# Altium PCB STM32F103ZET6.PCBDOC (part 4 of 5)
Units mil, origin at the board's own origin, x right, y up, seen from the top; angles counter-clockwise.
Board outline 7118.03 x 3660.03 mil, 2 copper layers (Top Layer, Bottom Layer); 158 components, 198 nets, 727 pads, 128 vias.
Unrouted connection lines stored in the file: 5.
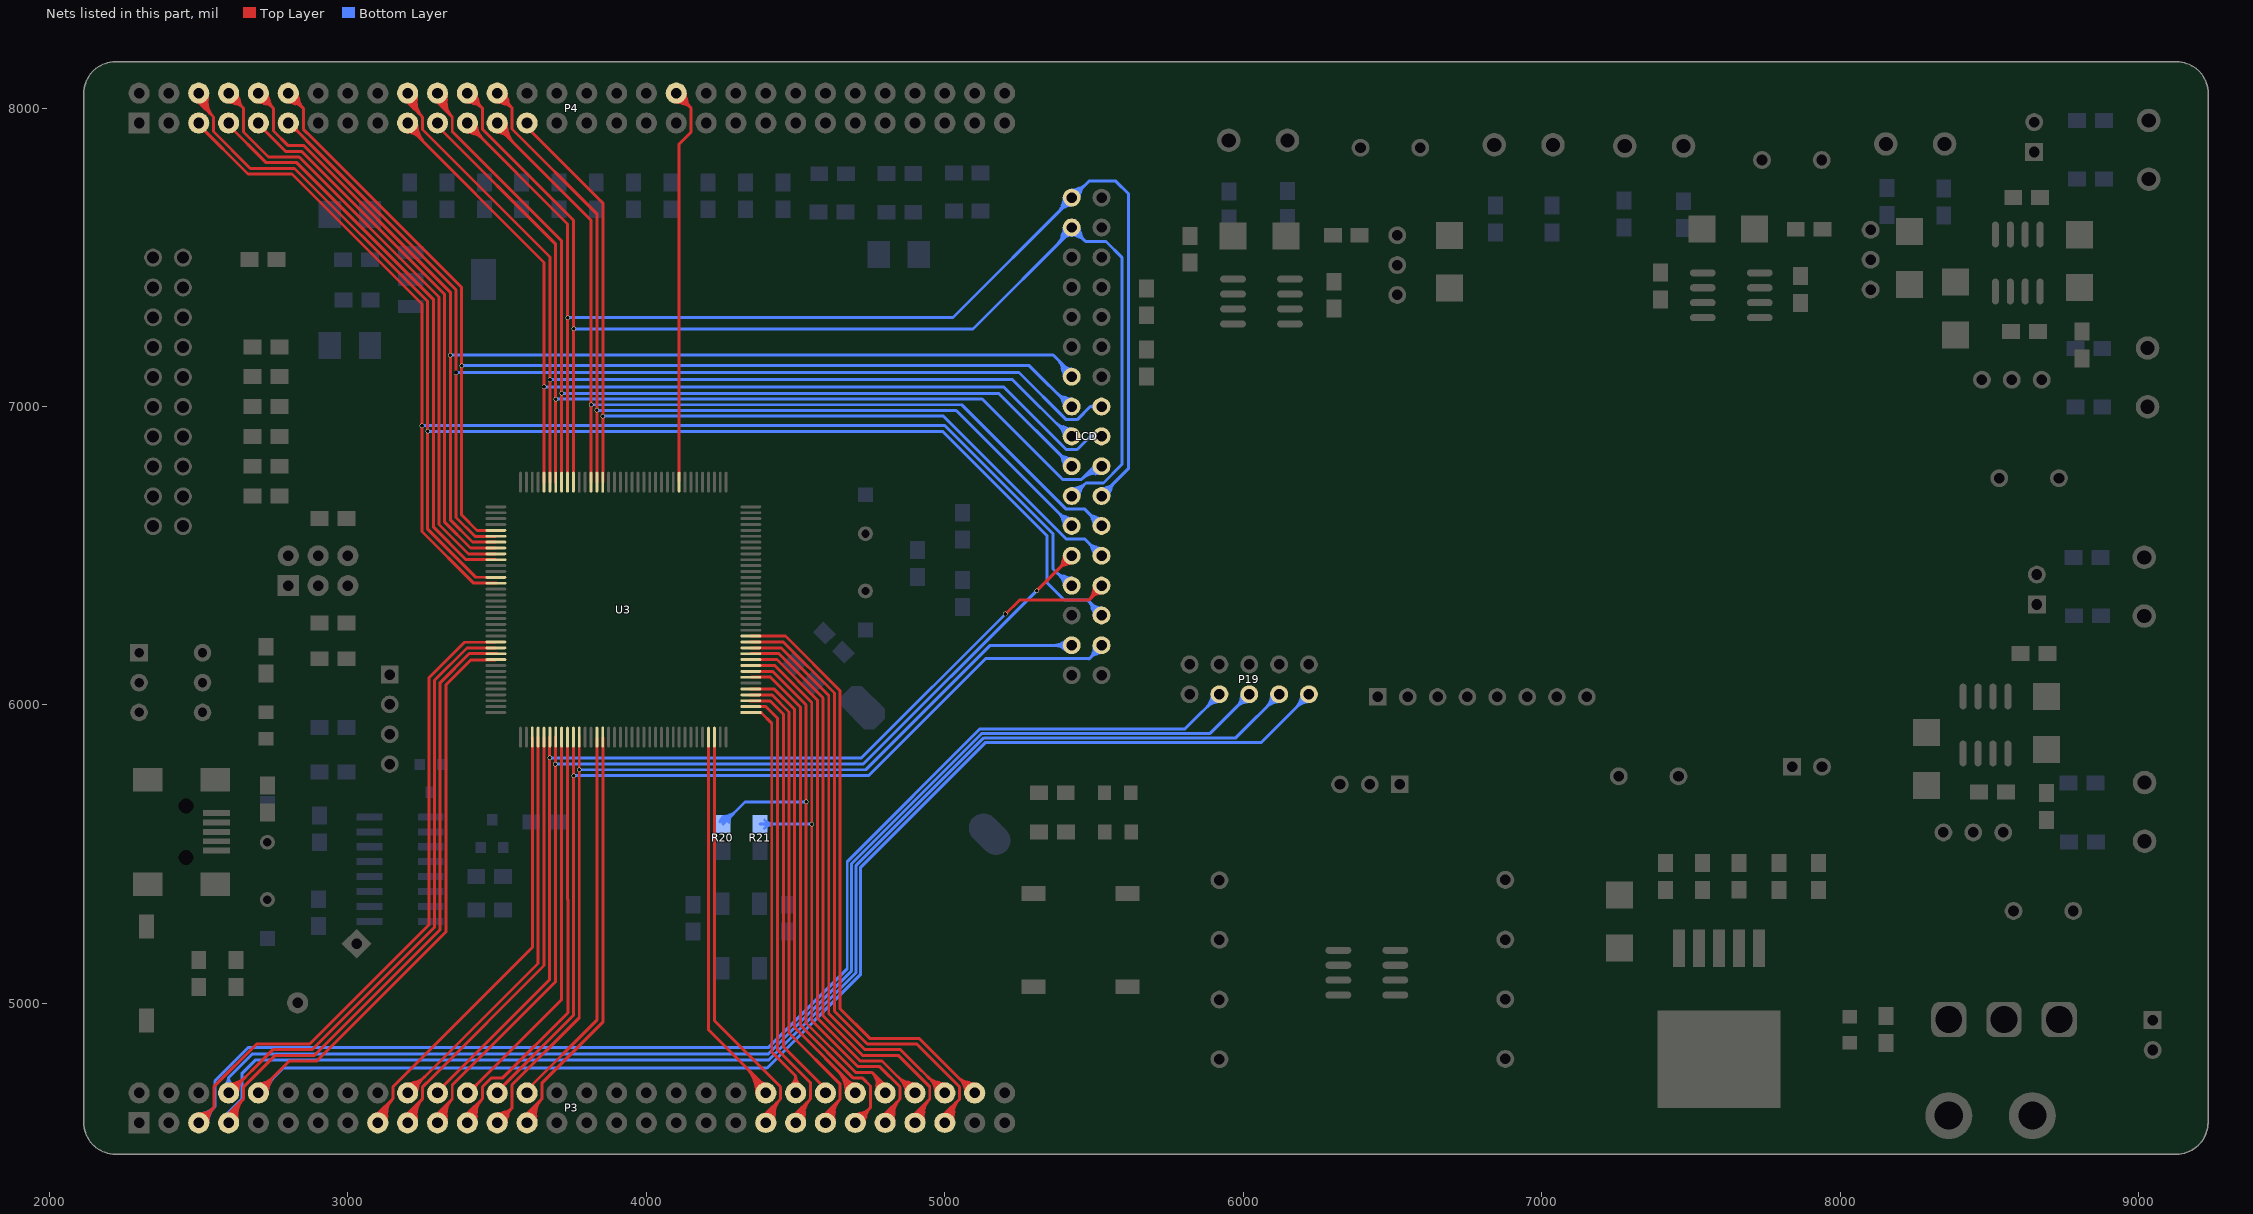
[diagram p4: the nets of this part, all layers, seen from the top]

## Via types
v1: diameter 15, hole 12, Top Layer to Bottom Layer, 57 vias
v2: diameter 28, hole 15, Top Layer to Bottom Layer, 53 vias
v3: diameter 50, hole 28, Top Layer to Bottom Layer, 10 vias
v4: diameter 12, hole 10, Top Layer to Bottom Layer, 4 vias
v5: diameter 20, hole 15, Top Layer to Bottom Layer, 2 vias
v6: diameter 48, hole 28, Top Layer to Bottom Layer, 1 vias
v7: diameter 40, hole 28, Top Layer to Bottom Layer, 1 vias

## Nets (pads, with @x,y where several pads share a name; then routed paths per layer and width w, separated by ;. In a path a pad name is that pad's centre, name@x,y a point inside that pad or via, vN(x,y) a via of type N, cw(c..) or ccw(c..) an arc to the next point about the centre after c; other vN are vias at no path point) (continued)
PC5: P4.38 U3.45 | length 1796.6
  Top Layer w10: P4.38@4090.82,8047.31 ccw(c4137.23,8060.89) 4126.39,8013.77 ; P4.38@4100,8050 4149.43,8000.57 ; P4.38@4102.69,8059.18 cw(c4089.11,8012.77) 4136.23,8023.61 ; U3.45@4110,6750 4110,7879.87 4149.43,7919.3 4149.43,8000.57 ; 4133.19,8016.81 cw(c4164.08,8047.71) 4120.42,8049.27 ccw(c4164.08,8047.71) 4133.19,8016.81 ; 4133.19,8016.81 ccw(c4102.29,7985.92) 4100.73,8029.58 cw(c4102.29,7985.92) 4133.19,8016.81 ; 4149.43,8000.57 cw(c4195.44,8046.58) 4130.41,8048.91 ccw(c4195.44,8046.58) 4149.43,8000.57 ; 4149.43,8000.57 ccw(c4103.42,7954.56) 4101.09,8019.59 cw(c4103.42,7954.56) 4149.43,8000.57
PC6: P3.5 P19.9 U3.96 | length 6995.1
  Top Layer w10: P3.5@2500,4600 2550.57,4650.57 ; P3.5@2500.4,4620.43 ccw(c2501.29,4666.61) 2533.95,4633.95 ccw(c2566.61,4601.29) P3.5@2520.43,4600.4 ; P3.5@2500.59,4630.43 ccw(c2501.92,4699.21) 2550.56,4650.56 ; P3.5@2530.43,4600.59 cw(c2599.21,4601.92) 2550.56,4650.56 ; U3.96@3495,6210.23 3390.84,6210.23 3271,6090.39 3271,5263.09 2871.91,4864 2694.09,4864 2550.57,4720.48 2550.57,4650.57
  Bottom Layer w10: P3.5@2500,4600 2554.57,4654.57 2554.57,4740.57 2667,4853 4410,4853 4673,5116 4673,5475 5118,5920 5805,5920 P19.9@5922,6037 ; P3.5@2500,4620.43 ccw(c2500,4669.76) 2534.88,4634.88 ccw(c2569.76,4600) P3.5@2520.43,4600 ; P3.5@2500,4630.43 ccw(c2500,4703.9) 2551.95,4651.95 ccw(c2603.9,4600) P3.5@2530.43,4600 ; 5876.62,5991.62 ccw(c5832.23,6036) P19.9@5895,6036 ; 5879.03,5994.03 cw(c5920,5953.06) P19.9@5920,6011 ; 5893.69,6008.69 ccw(c5866.37,6036) P19.9@5905,6036 ; 5896.1,6011.1 cw(c5920,5987.2) P19.9@5920,6021
PC7: P3.8 P19.8 U3.97 | length 6614.7
  Top Layer w10: P3.8@2600,4700 2603.22,4700 2748.22,4845 2879.78,4845 3290,5255.22 3290,6082.52 3398.71,6191.23 U3.97@3495,6191.23 ; P3.8@2600,4720.43 ccw(c2600,4777.54) 2640.38,4737.16 ; P3.8@2600,4730.43 ccw(c2600,4811.68) 2657.45,4754.23 ; P3.8@2620.43,4700 cw(c2661.99,4700) 2632.6,4729.38 ; P3.8@2630.43,4700 cw(c2696.13,4700) 2649.67,4746.45
  Bottom Layer w10: P3.8@2585.55,4726.78 ccw(c2572.49,4751) 2600,4751 ; P3.8@2600,4700 2600,4751 ; P3.8@2614.45,4726.78 cw(c2627.51,4751) 2600,4751 ; P19.8@5995,6036 cw(c5934.64,6036) 5977.32,5993.32 cw(c6020,5950.64) P19.8@6020,6011 ; P19.8@6005,6036 cw(c5968.79,6036) 5994.39,6010.39 cw(c6020,5984.79) P19.8@6020,6021 ; P19.8@6020,6036 5889,5905 5124.21,5905 4688,5468.79 4688,5109.79 4409.21,4831 2680,4831 2600,4751
PC8: P3.7 P19.7 U3.98 | length 7192
  Top Layer w10: P3.7@2600,4600 2600,4630.09 2650.57,4680.66 ; P3.7@2600.42,4600.1 cw(c2644.58,4610.51) 2612.5,4642.59 ; P3.7@2610.15,4602.39 cw(c2665.12,4615.35) 2625.19,4655.28 ; P3.7@2619.89,4604.69 cw(c2685.65,4620.19) 2637.88,4667.97 ; P3.7@2629.62,4606.98 cw(c2706.19,4625.03) 2650.56,4680.65 ; U3.98@3500,6172.23 3406.58,6172.23 3309,6074.65 3309,5247.35 2887.65,4826 2756.09,4826 2650.57,4720.48 2650.57,4680.66
  Bottom Layer w10: P3.7@2590.94,4596.92 cw(c2626.64,4609.06) 2599.98,4635.73 ; P3.7@2595.14,4630.04 ccw(c2594.22,4635.75) 2600,4635.75 ; P3.7@2600,4600 2600,4635.75 ; P3.7@2600.41,4600.14 cw(c2643.6,4614.83) 2611.34,4647.09 ; P3.7@2604.86,4630.04 cw(c2605.78,4635.75) 2600,4635.75 ; P3.7@2609.88,4603.36 cw(c2660.56,4620.6) 2622.7,4658.45 ; P3.7@2619.34,4606.58 cw(c2677.51,4626.37) 2634.07,4669.82 ; P3.7@2628.81,4609.8 cw(c2694.47,4632.14) 2645.43,4681.18 ; 6076.62,5991.62 ccw(c6032.23,6036) P19.7@6095,6036 ; 6079.03,5994.03 cw(c6120,5953.06) P19.7@6120,6011 ; 6093.69,6008.69 ccw(c6066.37,6036) P19.7@6105,6036 ; 6096.1,6011.1 cw(c6120,5987.2) P19.7@6120,6021 ; P19.7@6121,6036 5975,5890 5130.43,5890 4703,5462.57 4703,5103.57 4409.43,4810 2689,4810 2645.43,4766.43 2645.43,4681.18 ; 2600,4635.75 2645.43,4681.18
PC9: P3.10 P19.6 U3.99 | length 6704.4
  Top Layer w10: P3.10@2700,4700 2700,4704 2803,4807 2895.52,4807 3328,5239.48 3328,6066.78 3412.39,6151.17 U3.99@3495,6151.17 ; P3.10@2700,4720.43 ccw(c2700,4760.11) 2728.05,4732.05 ; P3.10@2700,4730.43 ccw(c2700,4794.25) 2745.12,4749.12 ; P3.10@2720.43,4700 cw(c2779.42,4700) 2737.71,4741.71 ; P3.10@2730.43,4700 cw(c2813.56,4700) 2754.78,4758.78
  Bottom Layer w10: P3.10@2700,4700 2784,4784 4404.64,4784 4718,5097.36 4718,5456.36 5136.64,5875 6061,5875 6220,6034 P19.6@6220,6035 ; P3.10@2700,4720.43 ccw(c2700,4769.76) 2734.88,4734.88 ccw(c2769.76,4700) P3.10@2720.43,4700 ; P3.10@2700,4730.43 ccw(c2700,4803.9) 2751.95,4751.95 ccw(c2803.9,4700) P3.10@2730.43,4700 ; 6175.91,5989.91 ccw(c6129.82,6036) P19.6@6195,6036 ; 6180.74,5994.74 cw(c6220,5955.47) P19.6@6220,6011 ; 6192.98,6006.98 ccw(c6163.96,6036) P19.6@6205,6036 ; 6197.81,6011.81 cw(c6220,5989.62) P19.6@6220,6021
PC10: P3.17 U3.111 | length 2111.8
  Top Layer w10: P3.17@3100,4600 3100,4630.09 3150.57,4680.66 ; P3.17@3106.56,4593.03 ccw(c3053.6,4649.3) 3130.83,4646.96 ; P3.17@3113.41,4585.75 ccw(c3077,4624.44) 3130.1,4622.83 ; U3.111@3617.17,5890 3618,5889.17 3618,5187.91 3150.57,4720.48 3150.57,4680.66 ; 3150.56,4680.65 ccw(c3206.19,4625.03) 3129.62,4606.98 cw(c3206.19,4625.03) 3150.56,4680.65 ; P3.17@3100.42,4600.1 cw(c3144.58,4610.51) 3112.5,4642.59 ccw(c3144.58,4610.51) P3.17@3100.42,4600.1 ; P3.17@3110.15,4602.39 cw(c3165.12,4615.35) 3125.19,4655.28 ccw(c3165.12,4615.35) P3.17@3110.15,4602.39 ; P3.17@3119.89,4604.69 cw(c3185.65,4620.19) 3137.88,4667.97 ccw(c3185.65,4620.19) P3.17@3119.89,4604.69
PC11: P3.20 U3.112 | length 1872.3
  Top Layer w10: P3.20@3190.7,4702.23 cw(c3236.88,4691.14) 3224.59,4737.02 ; P3.20@3200,4700 3203,4700 3637,5134 U3.112@3637,5892 ; P3.20@3200.42,4699.9 cw(c3255.48,4686.68) 3240.82,4741.37 ; P3.20@3200,4720.43 ccw(c3200,4777.01) 3240,4737 cw(c3200,4777.01) P3.20@3200,4720.43 ; P3.20@3200,4730.43 ccw(c3200,4811.15) 3257.07,4754.07 cw(c3200,4811.15) P3.20@3200,4730.43 ; P3.20@3220.43,4700 cw(c3262.52,4700) 3232.76,4729.76 ccw(c3262.52,4700) P3.20@3220.43,4700 ; P3.20@3230.43,4700 cw(c3296.66,4700) 3249.83,4746.83 ccw(c3296.66,4700) P3.20@3230.43,4700
PC12: P3.19 U3.113 | length 2087.2
  Top Layer w10: P3.19@3200,4600 3200,4630.09 3250.57,4680.66 ; P3.19@3206.56,4593.03 ccw(c3153.6,4649.3) 3230.83,4646.96 ; P3.19@3213.41,4585.75 ccw(c3177,4624.44) 3230.1,4622.83 ; U3.113@3657,5891 3657,5127 3279.52,4749.52 3279.52,4749.43 3250.57,4720.48 3250.57,4680.66 ; 3250.56,4680.65 ccw(c3306.19,4625.03) 3229.62,4606.98 cw(c3306.19,4625.03) 3250.56,4680.65 ; P3.19@3200.42,4600.1 cw(c3244.58,4610.51) 3212.5,4642.59 ccw(c3244.58,4610.51) P3.19@3200.42,4600.1 ; P3.19@3210.15,4602.39 cw(c3265.12,4615.35) 3225.19,4655.28 ccw(c3265.12,4615.35) P3.19@3210.15,4602.39 ; P3.19@3219.89,4604.69 cw(c3285.65,4620.19) 3237.88,4667.97 ccw(c3285.65,4620.19) P3.19@3219.89,4604.69
PC13: P3.49 U3.7 | length 2279.9
  Top Layer w10: U3.7@4352.88,6093 4415.61,6093 4516,5992.61 4516,4926.87 4693.44,4749.43 4724.57,4749.43 4750.57,4723.43 4750.57,4650.57 ; P3.49@4690.61,4602.03 cw(c4729.29,4595.11) 4719.12,4633.06 ; P3.49@4700,4600 4750.57,4650.57 ; P3.49@4700.46,4600.27 cw(c4746.41,4592.04) 4734.33,4637.14 ; P3.49@4702.37,4598.52 ccw(c4688.65,4648.8) 4739.25,4636.31 ; P3.49@4705.01,4588.87 ccw(c4693.78,4630) 4735.17,4619.78 ; 4750.56,4650.56 ccw(c4799.21,4601.92) 4730.43,4600.56 cw(c4799.21,4601.92) 4750.56,4650.56 ; P3.49@4701.97,4618.46 ccw(c4701.97,4658.29) 4730.13,4630.13 cw(c4701.97,4658.29) P3.49@4701.97,4618.46 ; P3.49@4701.97,4628.46 ccw(c4701.97,4692.43) 4747.2,4647.2 cw(c4701.97,4692.43) P3.49@4701.97,4628.46 ; P3.49@4720.43,4600.36 cw(c4766.64,4601.28) 4733.96,4633.96 ccw(c4766.64,4601.28) P3.49@4720.43,4600.36
PC14: P3.52 R20.2 U3.8 | length 2668.8
  Top Layer w10: U3.8@4350,6113 4422.48,6113 4535,6000.48 4535,4934.74 4701.31,4768.43 4756.57,4768.43 ; 4771.72,4725.05 ccw(c4824.79,4722.62) P3.52@4785.55,4686.81 ; P3.52@4800,4700 4800,4725 4756.57,4768.43 ; 4756.57,4768.43 cw(c4715.1,4726.96) 4770.99,4709.21 ccw(c4715.1,4726.96) 4756.57,4768.43 ; 4768.19,4756.81 cw(c4732.75,4721.36) 4780.53,4706.18 ccw(c4732.75,4721.36) 4768.19,4756.81 ; 4779.82,4745.18 cw(c4750.39,4715.75) 4790.06,4703.16 ccw(c4750.39,4715.75) 4779.82,4745.18 ; 4790.73,4734.27 ccw(c4800,4743.55) 4800,4730.43 cw(c4800,4743.55) 4790.73,4734.27
  Bottom Layer w10: R20.2@4246.4,5608.41 cw(c4274.6,5600.18) R20.2@4267,5628.55 ; R20.2@4256,5600.61 4330.39,5675 v1@4534,5675 ; R20.2@4256,5605.61 cw(c4294.56,5594.35) 4284.16,5633.15 ; R20.2@4256,5615.61 ccw(c4256,5651.82) 4281.61,5626.21 cw(c4256,5651.82) R20.2@4256,5615.61 ; R20.2@4256,5625.61 ccw(c4256,5685.96) 4298.68,5643.28 cw(c4256,5685.96) R20.2@4256,5625.61 ; R20.2@4276,5605.61 cw(c4312.21,5605.61) 4286.61,5631.21 ccw(c4312.21,5605.61) R20.2@4276,5605.61 ; 4526.55,5675 ccw(c4526.55,5684.45) 4533.23,5677.77 cw(c4526.55,5684.45) 4526.55,5675
  other v1: 4535,5676
PC15: P3.51 R21.2 U3.9 | length 2770.5
  Top Layer w10: U3.9@4350,6132 4430.35,6132 4554,6008.35 4554,4942.61 4708.61,4788 4781.91,4788 4849.43,4720.48 4849.43,4679.52 ; P3.51@4800,4600 4800,4630.09 4849.43,4679.52 ; P3.51@4803.04,4598.9 ccw(c4763.09,4639.81) 4820.27,4639.14 ; P3.51@4810.03,4591.75 ccw(c4763.9,4638.98) 4829.92,4638.2 ; 4849.43,4679.52 ccw(c4903.13,4625.82) 4829.55,4607.04 cw(c4903.13,4625.82) 4849.43,4679.52 ; P3.51@4800.48,4599.62 cw(c4843.78,4610.67) 4812.18,4642.27 ccw(c4843.78,4610.67) P3.51@4800.48,4599.62 ; P3.51@4810.17,4602.09 cw(c4863.56,4615.72) 4824.6,4654.69 ccw(c4863.56,4615.72) P3.51@4810.17,4602.09 ; P3.51@4819.86,4604.57 cw(c4883.34,4620.77) 4837.01,4667.11 ccw(c4883.34,4620.77) P3.51@4819.86,4604.57
  Bottom Layer w10: R21.2@4381,5600.61 4553.61,5600.61 v1(4554,5601) ; 4429.28,5600.61 cw(c4429.28,5648.89) 4395.14,5614.75 ccw(c4429.28,5648.89) 4429.28,5600.61 ; 4429.28,5600.61 ccw(c4429.28,5552.32) 4395.14,5586.46 cw(c4429.28,5552.32) 4429.28,5600.61
PD0: LCD.8 P3.22 U3.114 | length 3805.8
  Top Layer w10: P3.22@3300,4700 3300,4704 3676,5080 U3.114@3676,5892 ; v1@5203.5,6304.5 5250,6351 5482,6351 ; 5493.91,6368.61 cw(c5543.19,6358.51) LCD.8@5522.99,6404.58 ; 5504.14,6369.41 ccw(c5495.04,6403.36) LCD.8@5529.97,6399.44 ; LCD.8@5525,6400 5525,6394 5482,6351 ; 5482,6351 ccw(c5438.18,6394.83) 5500.04,6398.51 cw(c5438.18,6394.83) 5482,6351 ; v1@5203,6307.5 ccw(c5203,6315.95) 5208.97,6309.97 cw(c5203,6315.95) v1@5203,6307.5 ; 5492.56,6361.56 cw(c5525,6329.13) 5525,6375 ccw(c5525,6329.13) 5492.56,6361.56 ; 5497.73,6366.73 ccw(c5467.87,6396.59) 5510.03,6399.11 cw(c5467.87,6396.59) 5497.73,6366.73
  Bottom Layer w10: v1@3676,5822 4720,5822 v1(5203,6305) ; v1@3677.77,5824.77 ccw(c3684.45,5831.45) 3684.45,5822 cw(c3684.45,5831.45) v1@3677.77,5824.77
  other v1: 3676,5823
PD1: LCD.9 P3.21 U3.115 | length 4495.6
  Top Layer w10: P3.21@3300,4600 3300,4630.09 3349.43,4679.52 ; P3.21@3306.66,4593.13 ccw(c3252.87,4648.6) 3330.13,4647.41 ; P3.21@3313.62,4585.95 ccw(c3276.64,4624.09) 3329.76,4623.27 ; U3.115@3696,5894 3696,5073.13 3349.43,4726.56 3349.43,4679.52 ; v1(5308,6383) LCD.9@5425,6500 ; 5393.65,6476.32 cw(c5431.95,6466.06) LCD.9@5424,6504.9 ; 5401.32,6468.65 ccw(c5391.06,6506.95) LCD.9@5429.9,6499 ; 3349.43,4679.52 ccw(c3403.04,4625.91) 3329.51,4607.42 cw(c3403.04,4625.91) 3349.43,4679.52 ; 5382.32,6457.32 cw(c5425,6414.64) 5425,6475 ccw(c5425,6414.64) 5382.32,6457.32 ; 5382.32,6457.32 ccw(c5339.64,6500) 5400,6500 cw(c5339.64,6500) 5382.32,6457.32 ; 5399.39,6474.39 cw(c5425,6448.79) 5425,6485 ccw(c5425,6448.79) 5399.39,6474.39 ; 5399.39,6474.39 ccw(c5373.79,6500) 5410,6500 cw(c5373.79,6500) 5399.39,6474.39 ; P3.21@3300.42,4600.11 cw(c3343.26,4610.88) 3312.02,4642.12 ccw(c3343.26,4610.88) P3.21@3300.42,4600.11 ; P3.21@3310.12,4602.54 cw(c3363.19,4615.89) 3324.49,4654.58 ccw(c3363.19,4615.89) P3.21@3310.12,4602.54 ; P3.21@3319.82,4604.98 cw(c3383.11,4620.9) 3336.96,4667.05 ccw(c3383.11,4620.9) P3.21@3319.82,4604.98 ; v1@3693.23,5800.23 cw(c3686.55,5793.55) 3696,5793.55 ccw(c3686.55,5793.55) v1@3693.23,5800.23 ; v1@3693.23,5803.77 ccw(c3686.55,5810.45) 3696,5810.45 cw(c3686.55,5810.45) v1@3693.23,5803.77
  Bottom Layer w10: v1(3695,5802) 4727,5802 v1(5308,6383)
PD2: P3.24 U3.116 | length 1393.9
  Top Layer w10: P3.24@3400,4700 3404,4700 3431.57,4727.57 ; U3.116@3716,5892 3716,5013 3471.65,4768.65 3471.65,4768.43 3431.57,4728.35 3431.57,4727.57 ; 3431.57,4727.57 cw(c3422.74,4736.39) 3416.13,4725.81 ccw(c3422.74,4736.39) 3431.57,4727.57 ; 3431.57,4727.57 ccw(c3442.2,4716.93) 3428.24,4711.33 cw(c3442.2,4716.93) 3431.57,4727.57
PD3: P3.23 U3.117 | length 2065.1
  Top Layer w10: P3.23@3400,4600 3400,4630.09 3450.57,4680.66 ; P3.23@3406.56,4593.03 ccw(c3353.6,4649.3) 3430.83,4646.96 ; P3.23@3413.41,4585.75 ccw(c3377,4624.44) 3430.1,4622.83 ; U3.117@3736,5896 3736,5348.61 3737,5347.61 3737,4969.13 3517.3,4749.43 3479.52,4749.43 3450.57,4720.48 3450.57,4680.66 ; 3450.56,4680.65 ccw(c3506.19,4625.03) 3429.62,4606.98 cw(c3506.19,4625.03) 3450.56,4680.65 ; P3.23@3400.42,4600.1 cw(c3444.58,4610.51) 3412.5,4642.59 ccw(c3444.58,4610.51) P3.23@3400.42,4600.1 ; P3.23@3410.15,4602.39 cw(c3465.12,4615.35) 3425.19,4655.28 ccw(c3465.12,4615.35) P3.23@3410.15,4602.39 ; P3.23@3419.89,4604.69 cw(c3485.65,4620.19) 3437.88,4667.97 ccw(c3485.65,4620.19) P3.23@3419.89,4604.69
PD4: LCD.4 P3.26 U3.118 | length 3639.9
  Top Layer w10: P3.26@3500,4700 3500,4704 3756,4960 3756,5892 U3.118@3755,5893
  Bottom Layer w10: v1@3755,5761 3757,5763 4744,5763 5137,6156 5485,6156 5525,6196 LCD.4@5525,6200 ; 5483.61,6154.06 cw(c5524.31,6124.99) LCD.4@5524.77,6175 ; 5494.04,6168.65 ccw(c5464.31,6189.88) LCD.4@5500.34,6195.89 ; 5494.78,6169.69 cw(c5524.53,6148.45) LCD.4@5524.86,6185 ; 5503.2,6169.16 ccw(c5493.73,6204.51) LCD.4@5529.95,6199.29 ; 5485,6156 ccw(c5448.02,6192.98) 5500.1,6197.73 cw(c5448.02,6192.98) 5485,6156 ; 5489.15,6160.15 cw(c5525,6124.3) 5525,6175 ccw(c5525,6124.3) 5489.15,6160.15 ; 5500.09,6171.09 ccw(c5475.68,6195.5) 5510.06,6198.64 cw(c5475.68,6195.5) 5500.09,6171.09
  other v1: 3756,5763
PD5: LCD.3 P3.25 U3.119 | length 4002.7
  Top Layer w10: P3.25@3490.76,4602.49 cw(c3536.63,4590.13) 3525.6,4636.33 ; P3.25@3500,4600 3550,4650 ; P3.25@3502.49,4590.76 ccw(c3490.13,4636.63) 3536.33,4625.6 ; U3.119@3775,5896 3775,4952.13 3550,4727.13 3550,4650 ; 3533.57,4633.57 cw(c3501.8,4665.34) 3500.56,4620.43 ccw(c3501.8,4665.34) 3533.57,4633.57 ; 3533.57,4633.57 ccw(c3565.34,4601.8) 3520.43,4600.56 cw(c3565.34,4601.8) 3533.57,4633.57 ; 3550,4650 cw(c3502.68,4697.32) 3500.84,4630.42 ccw(c3502.68,4697.32) 3550,4650 ; 3550,4650 ccw(c3597.32,4602.68) 3530.42,4600.84 cw(c3597.32,4602.68) 3550,4650
  Bottom Layer w10: v1@3774,5783 4734.87,5783 5151.87,6200 LCD.3@5425,6200 ; 5364.64,6200 cw(c5364.64,6139.64) 5407.32,6182.32 ccw(c5364.64,6139.64) 5364.64,6200 ; 5364.64,6200 ccw(c5364.64,6260.36) 5407.32,6217.68 cw(c5364.64,6260.36) 5364.64,6200 ; 5388.79,6200 cw(c5388.79,6163.79) 5414.39,6189.39 ccw(c5388.79,6163.79) 5388.79,6200 ; 5388.79,6200 ccw(c5388.79,6236.21) 5414.39,6210.61 cw(c5388.79,6236.21) 5388.79,6200
  other v1: 3775,5783
PD6: P3.28 U3.122 | length 1285.9
  Top Layer w10: P3.28@3600,4700 3600,4710 3834,4944 U3.122@3834,5889
PD7: P3.27 U3.123 | length 1993.8
  Top Layer w10: P3.27@3600,4600 3600,4630.09 3649.43,4679.52 ; P3.27@3606.66,4593.13 ccw(c3552.87,4648.6) 3630.13,4647.41 ; P3.27@3613.62,4585.95 ccw(c3576.64,4624.09) 3629.76,4623.27 ; U3.123@3854,5891 3854,4937.13 3649.43,4732.56 3649.43,4679.52 ; 3649.43,4679.52 ccw(c3703.04,4625.91) 3629.51,4607.42 cw(c3703.04,4625.91) 3649.43,4679.52 ; P3.27@3600.42,4600.11 cw(c3643.26,4610.88) 3612.02,4642.12 ccw(c3643.26,4610.88) P3.27@3600.42,4600.11 ; P3.27@3610.12,4602.54 cw(c3663.19,4615.89) 3624.49,4654.58 ccw(c3663.19,4615.89) P3.27@3610.12,4602.54 ; P3.27@3619.82,4604.98 cw(c3683.11,4620.9) 3636.96,4667.05 ccw(c3683.11,4620.9) P3.27@3619.82,4604.98
PD8: LCD.19 P4.12 U3.77 | length 4710.6
  Top Layer w10: P4.12@2790.72,8047.69 ccw(c2836.11,8058.98) 2824.88,8013.56 ; P4.12@2800,8050 2850.57,7999.43 ; P4.12@2802.31,8059.28 cw(c2791.02,8013.89) 2836.44,8025.12 ; U3.77@3491.25,6585 3432.26,6585 3381,6636.26 3381,7399 2879.52,7900.48 2879.52,7900.57 2850.57,7929.52 2850.57,7999.43 ; 2833.95,8016.05 cw(c2866.61,8048.71) 2820.43,8049.6 ccw(c2866.61,8048.71) 2833.95,8016.05 ; 2833.95,8016.05 ccw(c2801.29,7983.39) 2800.4,8029.57 cw(c2801.29,7983.39) 2833.95,8016.05 ; 2850.56,7999.44 cw(c2899.21,8048.08) 2830.43,8049.41 ccw(c2899.21,8048.08) 2850.56,7999.44 ; 2850.56,7999.44 ccw(c2801.92,7950.79) 2800.59,8019.57 cw(c2801.92,7950.79) 2850.56,7999.44
  Bottom Layer w10: v1@3382,7137 5283,7137 5420,7000 LCD.19@5425,7000 ; 5394.28,7021.33 ccw(c5428.93,7030.61) LCD.19@5424.36,6995.04 ; 5398.97,7031.98 cw(c5387.65,6989.73) LCD.19@5429.82,7001.33 ; 5373.79,7046.21 ccw(c5425,7097.43) 5425,7025 cw(c5425,7097.43) 5373.79,7046.21 ; 5385.86,7034.14 cw(c5351.72,7000) 5400,7000 ccw(c5351.72,7000) 5385.86,7034.14 ; 5390.86,7029.14 ccw(c5425,7063.28) 5425,7015 cw(c5425,7063.28) 5390.86,7029.14
  other v1: 3381,7137
PD9: LCD.20 P4.11 U3.78 | length 4105.3
  Top Layer w10: P4.11@2800,7950 2804,7950 2831.57,7922.43 ; U3.78@3495,6565 3425.39,6565 3362,6628.39 3362,7391.13 2860.52,7892.61 2860.52,7892.7 2831.57,7921.65 2831.57,7922.43 ; 2831.57,7922.43 cw(c2842.2,7933.07) 2828.24,7938.67 ccw(c2842.2,7933.07) 2831.57,7922.43 ; 2831.57,7922.43 ccw(c2822.74,7913.61) 2816.13,7924.19 cw(c2822.74,7913.61) 2831.57,7922.43
  Bottom Layer w10: v1@3363,7114 5248.77,7114 5406.77,6956 5443.23,6956 5487.23,7000 ; LCD.20@5525,7000 5487.23,7000 ; 5487.23,7000 cw(c5487.23,6983.96) 5501.99,6990.23 ccw(c5487.23,6983.96) 5487.23,7000 ; 5487.23,7000 ccw(c5487.23,7016.04) 5501.99,7009.77 cw(c5487.23,7016.04) 5487.23,7000
  other v1: 3362,7114
PD10: LCD.21 P4.10 U3.79 | length 4988.6
  Top Layer w10: P4.10@2690.72,8047.69 ccw(c2736.11,8058.98) 2724.88,8013.56 ; P4.10@2700,8050 2750.57,7999.43 ; P4.10@2702.31,8059.28 cw(c2691.02,8013.89) 2736.44,8025.12 ; U3.79@3495,6546 3417.52,6546 3343,6620.52 3343,7383.13 2852.65,7873.48 2852.65,7873.61 2852.26,7874 2800,7874 2750.57,7923.43 2750.57,7999.43 ; 2733.95,8016.05 cw(c2766.61,8048.71) 2720.43,8049.6 ccw(c2766.61,8048.71) 2733.95,8016.05 ; 2733.95,8016.05 ccw(c2701.29,7983.39) 2700.4,8029.57 cw(c2701.29,7983.39) 2733.95,8016.05 ; 2750.56,7999.44 cw(c2799.21,8048.08) 2730.43,8049.41 ccw(c2799.21,8048.08) 2750.56,7999.44 ; 2750.56,7999.44 ccw(c2701.92,7950.79) 2700.59,8019.57 cw(c2701.92,7950.79) 2750.56,7999.44
  Bottom Layer w10: v1@3342,7172 5361,7173 ; 5362,7173 5363,7173 5425,7111 LCD.21@5425,7100 ; 5387.36,7147.19 ccw(c5447.31,7163.25) LCD.21@5426.66,7104.72 ; 5392.27,7128.85 ccw(c5439.66,7141.55) LCD.21@5423.34,7095.28 ; 5403.15,7125.55 ccw(c5430.54,7132.89) LCD.21@5425.83,7104.93 ; 5374.54,7161.46 cw(c5313.09,7100) 5400,7100 ccw(c5313.09,7100) 5374.54,7161.46 ; 5391.62,7144.38 cw(c5347.23,7100) 5410,7100 ccw(c5347.23,7100) 5391.62,7144.38 ; 5401.1,7134.9 ccw(c5425,7158.8) 5425,7125 cw(c5425,7158.8) 5401.1,7134.9 ; 5408.69,7127.31 cw(c5381.37,7100) 5420,7100 ccw(c5381.37,7100) 5408.69,7127.31
  other v1: 3343,7172
PD11: P4.9 U3.80 | length 1834.9
  Top Layer w10: P4.9@2700,7950 2700,7946 2791,7855 2844.26,7855 3324,7375.26 3324,6612.65 3410.65,6526 U3.80@3496,6526
PD12: P4.8 U3.81 | length 2492.9
  Top Layer w10: P4.8@2590.76,8047.51 ccw(c2636.63,8059.87) 2625.6,8013.67 ; P4.8@2600,8050 2650,8000 2650,7919.87 2733.87,7836 2836.39,7836 3305,7367.39 3305,6604.78 3403.78,6506 U3.81@3494,6506 ; P4.8@2602.49,8059.24 cw(c2590.13,8013.37) 2636.33,8024.4 ; 2633.57,8016.43 cw(c2665.34,8048.2) 2620.43,8049.44 ccw(c2665.34,8048.2) 2633.57,8016.43 ; 2633.57,8016.43 ccw(c2601.8,7984.66) 2600.56,8029.57 cw(c2601.8,7984.66) 2633.57,8016.43 ; 2650,8000 cw(c2697.32,8047.32) 2630.42,8049.16 ccw(c2697.32,8047.32) 2650,8000 ; 2650,8000 ccw(c2602.68,7952.68) 2600.84,8019.58 cw(c2602.68,7952.68) 2650,8000
PD13: P4.7 U3.82 | length 1951.8
  Top Layer w10: P4.7@2600,7950 2600,7943 2726,7817 2828.52,7817 3286,7359.52 3286,6596.91 3395.91,6487 U3.82@3495,6487
PD14: LCD.6 P4.6 U3.85 | length 5719.4
  Top Layer w10: P4.6@2500,8050 2500,8019.91 2549.43,7970.48 ; P4.6@2506.66,8056.87 cw(c2452.87,8001.4) 2530.13,8002.59 ; P4.6@2513.62,8064.05 cw(c2476.64,8025.91) 2529.76,8026.73 ; U3.85@3496,6428 3428.04,6428 3267,6589.04 3267,7351.65 2820.65,7798 2672.87,7798 2549.43,7921.44 2549.43,7970.48 ; 2549.43,7970.48 cw(c2603.04,8024.09) 2529.51,8042.58 ccw(c2603.04,8024.09) 2549.43,7970.48 ; P4.6@2500.42,8049.89 ccw(c2543.26,8039.12) 2512.02,8007.88 cw(c2543.26,8039.12) P4.6@2500.42,8049.89 ; P4.6@2510.12,8047.46 ccw(c2563.19,8034.11) 2524.49,7995.42 cw(c2563.19,8034.11) P4.6@2510.12,8047.46 ; P4.6@2519.82,8045.02 ccw(c2583.11,8029.1) 2536.96,7982.95 cw(c2583.11,8029.1) P4.6@2519.82,8045.02
  Bottom Layer w10: v1(3267,6917) 4992.26,6917 5343,6566.26 5343,6409 5401,6351 5479,6351 ; 5493.08,6326.22 ccw(c5535.52,6337.45) LCD.6@5523.65,6295.19 ; 5503.67,6330.72 cw(c5494.39,6296.08) LCD.6@5529.96,6300.64 ; LCD.6@5525,6300 5525,6305 5479,6351 ; 5479,6351 cw(c5428.31,6300.3) 5500,6300.08 ccw(c5428.31,6300.3) 5479,6351 ; 5490.86,6339.14 ccw(c5525,6373.28) 5525,6325 cw(c5525,6373.28) 5490.86,6339.14 ; 5496,6334 cw(c5462.19,6300.2) 5510,6300.05 ccw(c5462.19,6300.2) 5496,6334
PD15: LCD.7 P4.5 U3.86 | length 4913.2
  Top Layer w10: P4.5@2500,7950 2500,7944 2665,7779 2812.78,7779 3248,7343.78 3248,6581.17 3421.17,6408 U3.86@3497,6408
  Bottom Layer w10: v1@3250,6936 5000.13,6936 5362,6574.13 5362,6456 5418,6400 LCD.7@5425,6400 ; 5394.54,6420.39 ccw(c5427.8,6429.3) LCD.7@5424.52,6395.02 ; 5398.03,6432.23 cw(c5386.26,6388.31) LCD.7@5429.79,6401.44 ; 5370.37,6447.63 ccw(c5425,6502.25) 5425,6425 cw(c5425,6502.25) 5370.37,6447.63 ; 5387.27,6430.73 cw(c5356.54,6400) 5400,6400 ccw(c5356.54,6400) 5387.27,6430.73 ; 5387.44,6430.56 ccw(c5425,6468.11) 5425,6415 cw(c5425,6468.11) 5387.44,6430.56
  other v1: 3248,6936
PE0: P3.44 U3.141 | length 2020.9
  Top Layer w10: U3.141@4208,5892 4208,4911.74 4400,4719.74 P3.44@4400,4700 ; 4366.98,4746.98 ccw(c4418.02,4760.66) P3.44@4402.97,4710 ; 4371.61,4729.71 ccw(c4412.05,4740.55) P3.44@4400.12,4700.42 ; 4378.99,4739.48 ccw(c4404.05,4746.2) P3.44@4401.78,4720.36 ; 4384.51,4734.58 cw(c4375.74,4701.84) P3.44@4409.54,4699.28 ; 4334.09,4785.65 cw(c4248.44,4700) 4369.57,4700 ccw(c4248.44,4700) 4334.09,4785.65 ; 4351.16,4768.58 cw(c4282.58,4700) 4379.57,4700 ccw(c4282.58,4700) 4351.16,4768.58 ; 4368.23,4751.51 cw(c4316.72,4700) 4389.57,4700 ccw(c4316.72,4700) 4368.23,4751.51 ; 4381.75,4737.99 ccw(c4400,4756.25) 4400,4730.43 cw(c4400,4756.25) 4381.75,4737.99 ; 4385.3,4734.44 cw(c4350.87,4700) 4399.57,4700 ccw(c4350.87,4700) 4385.3,4734.44
PE1: P3.43 U3.142 | length 2004.5
  Top Layer w10: U3.142@4228,5896 4228,4942 4420.48,4749.52 4420.48,4749.43 4449.43,4720.48 4449.43,4679.52 ; P3.43@4400,4600 4400,4630.09 4449.43,4679.52 ; P3.43@4403.04,4598.9 ccw(c4363.09,4639.81) 4420.27,4639.14 ; P3.43@4410.03,4591.75 ccw(c4363.9,4638.98) 4429.92,4638.2 ; 4449.43,4679.52 ccw(c4503.13,4625.82) 4429.55,4607.04 cw(c4503.13,4625.82) 4449.43,4679.52 ; P3.43@4400.48,4599.62 cw(c4443.78,4610.67) 4412.18,4642.27 ccw(c4443.78,4610.67) P3.43@4400.48,4599.62 ; P3.43@4410.17,4602.09 cw(c4463.56,4615.72) 4424.6,4654.69 ccw(c4463.56,4615.72) P3.43@4410.17,4602.09 ; P3.43@4419.86,4604.57 cw(c4483.34,4620.77) 4437.01,4667.11 ccw(c4483.34,4620.77) P3.43@4419.86,4604.57
PE2: P3.46 U3.1 | length 1620.3
  Top Layer w10: U3.1@4352,5975 4384,5975 4420,5939 4420,4837.13 4500,4757.13 ; P3.46@4500,4700 4500,4757.13 ; 4500,4738.36 cw(c4474.22,4738.36) 4488.6,4716.96 ccw(c4474.22,4738.36) 4500,4738.36 ; 4500,4738.36 ccw(c4525.78,4738.36) 4511.4,4716.96 cw(c4525.78,4738.36) 4500,4738.36 ; 4500,4757.13 cw(c4461.6,4757.13) 4483.02,4725.26 ccw(c4461.6,4757.13) 4500,4757.13 ; 4500,4757.13 ccw(c4538.4,4757.13) 4516.98,4725.26 cw(c4538.4,4757.13) 4500,4757.13 ; U3.1@4380.14,5975.19 cw(c4380.14,5966.35) 4386.4,5972.6 ccw(c4380.14,5966.35) U3.1@4380.14,5975.19
PE3: P3.45 U3.2 | length 2131.7
  Top Layer w10: U3.2@4342,5995 4400,5995 4440,5955 4440,4844 4549.43,4734.57 4549.43,4679.52 ; P3.45@4500,4600 4500,4630.09 4549.43,4679.52 ; P3.45@4503.04,4598.9 ccw(c4463.09,4639.81) 4520.27,4639.14 ; P3.45@4510.03,4591.75 ccw(c4463.9,4638.98) 4529.92,4638.2 ; 4549.43,4679.52 ccw(c4603.13,4625.82) 4529.55,4607.04 cw(c4603.13,4625.82) 4549.43,4679.52 ; P3.45@4500.48,4599.62 cw(c4543.78,4610.67) 4512.18,4642.27 ccw(c4543.78,4610.67) P3.45@4500.48,4599.62 ; P3.45@4510.17,4602.09 cw(c4563.56,4615.72) 4524.6,4654.69 ccw(c4563.56,4615.72) P3.45@4510.17,4602.09 ; P3.45@4519.86,4604.57 cw(c4583.34,4620.77) 4537.01,4667.11 ccw(c4583.34,4620.77) P3.45@4519.86,4604.57
PE4: P3.48 U3.3 | length 1458
  Top Layer w10: U3.3@4347,6014 4414,6014 4459,5969 4459,4855 4600,4714 P3.48@4600,4700
PE5: P3.47 U3.4 | length 2219.3
  Top Layer w10: U3.4@4347,6034 4420.87,6034 4478,5976.87 4478,4901 4649.43,4729.57 4649.43,4679.52 ; P3.47@4600,4600 4600,4630.09 4649.43,4679.52 ; P3.47@4603.04,4598.9 ccw(c4563.09,4639.81) 4620.27,4639.14 ; P3.47@4610.03,4591.75 ccw(c4563.9,4638.98) 4629.92,4638.2 ; 4649.43,4679.52 ccw(c4703.13,4625.82) 4629.55,4607.04 cw(c4703.13,4625.82) 4649.43,4679.52 ; P3.47@4600.48,4599.62 cw(c4643.78,4610.67) 4612.18,4642.27 ccw(c4643.78,4610.67) P3.47@4600.48,4599.62 ; P3.47@4610.17,4602.09 cw(c4663.56,4615.72) 4624.6,4654.69 ccw(c4663.56,4615.72) P3.47@4610.17,4602.09 ; P3.47@4619.86,4604.57 cw(c4683.34,4620.77) 4637.01,4667.11 ccw(c4683.34,4620.77) P3.47@4619.86,4604.57
PE6: P3.50 U3.5 | length 2181.5
  Top Layer w10: U3.5@4349,6053 4428.74,6053 4497,5984.74 4497,4919 4700,4716 P3.50@4700,4700 ; 4667.71,4744.27 ccw(c4714.02,4756.68) P3.50@4702.51,4710.13 ; 4672.09,4727.9 ccw(c4709.38,4737.89) P3.50@4700.1,4700.42 ; 4679.9,4736.08 ccw(c4700.3,4741.55) P3.50@4700.15,4720.43 ; 4683.01,4734.98 cw(c4673.74,4700.38) P3.50@4709.57,4699.86 ; 4636.73,4779.27 cw(c4557.47,4700) 4669.57,4700 ccw(c4557.47,4700) 4636.73,4779.27 ; 4653.8,4762.19 cw(c4591.61,4700) 4679.57,4700 ccw(c4591.61,4700) 4653.8,4762.19 ; 4670.88,4745.12 cw(c4625.75,4700) 4689.57,4700 ccw(c4625.75,4700) 4670.88,4745.12 ; 4675.36,4740.64 ccw(c4700,4765.28) 4700,4730.43 cw(c4700,4765.28) 4675.36,4740.64
PE7: LCD.10 P4.27 U3.58 | length 3579.2
  Top Layer w10: P4.27@3600,7950 3600,7936 3854,7682 U3.58@3854,6747
  Bottom Layer w10: v1@3854,6968 4995,6968 5381,6582 5381,6581.77 5406.77,6556 5469,6556 LCD.10@5525,6500 ; 5493.65,6523.68 ccw(c5531.95,6533.94) LCD.10@5524,6495.1 ; 5501.32,6531.35 cw(c5491.06,6493.05) LCD.10@5529.9,6501 ; 5482.32,6542.68 cw(c5439.64,6500) 5500,6500 ccw(c5439.64,6500) 5482.32,6542.68 ; 5482.32,6542.68 ccw(c5525,6585.36) 5525,6525 cw(c5525,6585.36) 5482.32,6542.68 ; 5499.39,6525.61 cw(c5473.79,6500) 5510,6500 ccw(c5473.79,6500) 5499.39,6525.61 ; 5499.39,6525.61 ccw(c5525,6551.21) 5525,6515 cw(c5525,6551.21) 5499.39,6525.61 ; v1@3855.77,6965.23 cw(c3862.45,6958.55) 3862.45,6968 ccw(c3862.45,6958.55) v1@3855.77,6965.23
  other v1: 3854,6967
PE8: LCD.11 P4.26 U3.59 | length 4049.5
  Top Layer w10: P4.26@3490.76,8047.51 ccw(c3536.63,8059.87) 3525.6,8013.67 ; P4.26@3500,8050 3550,8000 3550,7930 3834,7646 U3.59@3834,6747 ; P4.26@3502.49,8059.24 cw(c3490.13,8013.37) 3536.33,8024.4 ; 3533.57,8016.43 cw(c3565.34,8048.2) 3520.43,8049.44 ccw(c3565.34,8048.2) 3533.57,8016.43 ; 3533.57,8016.43 ccw(c3501.8,7984.66) 3500.56,8029.57 cw(c3501.8,7984.66) 3533.57,8016.43 ; 3550,8000 cw(c3597.32,8047.32) 3530.42,8049.16 ccw(c3597.32,8047.32) 3550,8000 ; 3550,8000 ccw(c3502.68,7952.68) 3500.84,8019.58 cw(c3502.68,7952.68) 3550,8000
  Bottom Layer w10: v1(3834,6987) 5038,6987 LCD.11@5425,6600 ; 5393.65,6623.68 ccw(c5431.95,6633.94) LCD.11@5424,6595.1 ; 5401.32,6631.35 cw(c5391.06,6593.05) LCD.11@5429.9,6601 ; 5382.32,6642.68 cw(c5339.64,6600) 5400,6600 ccw(c5339.64,6600) 5382.32,6642.68 ; 5382.32,6642.68 ccw(c5425,6685.36) 5425,6625 cw(c5425,6685.36) 5382.32,6642.68 ; 5399.39,6625.61 cw(c5373.79,6600) 5410,6600 ccw(c5373.79,6600) 5399.39,6625.61 ; 5399.39,6625.61 ccw(c5425,6651.21) 5425,6615 cw(c5425,6651.21) 5399.39,6625.61
PE9: LCD.12 P4.25 U3.60 | length 4176.4
  Top Layer w10: P4.25@3490.44,7949.56 ccw(c3528.43,7951.32) 3518.59,7914.59 ; P4.25@3498.04,7939.75 cw(c3489.97,7897.51) 3531.52,7908.64 ; P4.25@3499.92,7949.57 cw(c3493.3,7914.91) 3527.39,7924.04 ; P4.25@3500,7950 3500,7938 3815,7623 U3.60@3815,6748 ; P4.25@3500,7919.57 cw(c3500,7875.07) 3531.47,7906.53 ccw(c3500,7875.07) P4.25@3500,7919.57 ; P4.25@3510.43,7950 ccw(c3564.59,7950) 3526.3,7911.7 cw(c3564.59,7950) P4.25@3510.43,7950 ; P4.25@3520.43,7950 ccw(c3598.73,7950) 3543.37,7894.63 cw(c3598.73,7950) P4.25@3520.43,7950 ; P4.25@3530.43,7950 ccw(c3632.88,7950) 3560.44,7877.56 cw(c3632.88,7950) P4.25@3530.43,7950
  Bottom Layer w10: v1(3815,7006) 5056.77,7006 5406.77,6656 5469,6656 LCD.12@5525,6600 ; 5493.65,6623.68 ccw(c5531.95,6633.94) LCD.12@5524,6595.1 ; 5501.32,6631.35 cw(c5491.06,6593.05) LCD.12@5529.9,6601 ; 5482.32,6642.68 cw(c5439.64,6600) 5500,6600 ccw(c5439.64,6600) 5482.32,6642.68 ; 5482.32,6642.68 ccw(c5525,6685.36) 5525,6625 cw(c5525,6685.36) 5482.32,6642.68 ; 5499.39,6625.61 cw(c5473.79,6600) 5510,6600 ccw(c5473.79,6600) 5499.39,6625.61 ; 5499.39,6625.61 ccw(c5525,6651.21) 5525,6615 cw(c5525,6651.21) 5499.39,6625.61
PE10: LCD.13 LCD.31 P4.24 U3.63 | length 6009.5
  Top Layer w10: P4.24@3390.76,8047.51 ccw(c3436.63,8059.87) 3425.6,8013.67 ; P4.24@3400,8050 3450,8000 3450,7930.09 3479.52,7900.57 3479.52,7900.48 3756,7624 U3.63@3756,6747 ; P4.24@3402.49,8059.24 cw(c3390.13,8013.37) 3436.33,8024.4 ; 3433.57,8016.43 cw(c3465.34,8048.2) 3420.43,8049.44 ccw(c3465.34,8048.2) 3433.57,8016.43 ; 3433.57,8016.43 ccw(c3401.8,7984.66) 3400.56,8029.57 cw(c3401.8,7984.66) 3433.57,8016.43 ; 3450,8000 cw(c3497.32,8047.32) 3430.42,8049.16 ccw(c3497.32,8047.32) 3450,8000 ; 3450,8000 ccw(c3402.68,7952.68) 3400.84,8019.58 cw(c3402.68,7952.68) 3450,8000
  Bottom Layer w10: v1@3755,7260 5094,7260 5425,7591 LCD.31@5425,7600 5472,7553 5540,7553 5593,7500 5593,6805.77 5531.23,6744 5473,6744 ; 5387.74,7554.24 cw(c5445.02,7538.9) LCD.31@5426.56,7595.25 ; 5392.52,7572.09 cw(c5438.15,7559.86) LCD.31@5423.44,7604.75 ; 5405.55,7569.79 ccw(c5397,7601.72) LCD.31@5429.99,7599.69 ; LCD.31@5420.1,7599 ccw(c5458.94,7606.95) 5448.68,7568.65 ; LCD.13@5420.23,6701.48 cw(c5462.63,6688.31) 5452.13,6731.46 ; LCD.13@5424,6700 LCD.13@5425,6700 5429,6700 5473,6744 ; LCD.13@5425.71,6695.05 ccw(c5420.49,6731.27) 5455.84,6721.8 ; LCD.31@5426,7604.9 cw(c5418.05,7566.06) 5456.35,7576.32 ; LCD.31@5425,7575 ccw(c5425,7536.37) 5397.69,7563.69 cw(c5425,7536.37) LCD.31@5425,7575 ; LCD.31@5425,7575 cw(c5425,7514.64) 5467.68,7557.32 ; LCD.31@5425,7575 cw(c5425,7514.64) 5467.68,7557.32 ; 5450.61,7574.39 cw(c5476.21,7600) 5440,7600 ccw(c5476.21,7600) 5450.61,7574.39 ; 5450.61,7574.39 ccw(c5425,7548.79) 5425,7585 cw(c5425,7548.79) 5450.61,7574.39 ; 5467.68,7557.32 cw(c5510.36,7600) 5450,7600 ccw(c5510.36,7600) 5467.68,7557.32 ; 5473,6744 cw(c5427.08,6789.92) 5425.58,6724.99 ccw(c5427.08,6789.92) 5473,6744 ; 5375.96,7541.96 ccw(c5317.92,7600) 5400,7600 cw(c5317.92,7600) 5375.96,7541.96 ; 5393.03,7559.03 ccw(c5352.06,7600) 5410,7600 cw(c5352.06,7600) 5393.03,7559.03 ; LCD.13@5425.35,6715 ccw(c5426.33,6757.61) 5456.47,6727.47 cw(c5426.33,6757.61) LCD.13@5425.35,6715 ; LCD.13@5450,6700 cw(c5500.7,6700) 5464.85,6735.85 ccw(c5500.7,6700) LCD.13@5450,6700
  other v1: 3756,7260
PE11: LCD.14 LCD.33 P4.23 U3.64 | length 6105.6
  Top Layer w10: P4.23@3390.58,7948.3 ccw(c3434.01,7956.13) 3422.59,7913.51 ; P4.23@3400,7950 3400,7948 3736,7612 U3.64@3736,6747 ; P4.23@3400.43,7950.08 ccw(c3451.16,7959.23) 3437.81,7909.43 ; P4.23@3400,7919.57 cw(c3400,7850.92) 3448.54,7899.46 ccw(c3400,7850.92) P4.23@3400,7919.57 ; P4.23@3400,7929.57 cw(c3400,7885.07) 3431.47,7916.53 ccw(c3400,7885.07) P4.23@3400,7929.57 ; P4.23@3420.43,7950 ccw(c3474.59,7950) 3436.3,7911.7 cw(c3474.59,7950) P4.23@3420.43,7950 ; P4.23@3430.43,7950 ccw(c3508.73,7950) 3453.37,7894.63 cw(c3508.73,7950) P4.23@3430.43,7950
  Bottom Layer w10: v1@3737,7298 5027,7298 5425,7696 LCD.33@5425,7700 5428,7700 5483,7755 5573,7755 5616,7712 5616,6793 LCD.14@5524,6701 ; 5393.15,7674.44 cw(c5434.59,7663.34) LCD.33@5423.74,7704.84 ; 5403.2,7669.16 ccw(c5393.73,7704.51) LCD.33@5429.95,7699.29 ; LCD.33@5420.15,7701.2 cw(c5460.98,7691.09) 5450.09,7731.72 ; LCD.33@5425.79,7695.06 ccw(c5419.9,7731.93) 5455.97,7722.27 ; LCD.14@5520.07,6700.86 cw(c5557.6,6694.3) 5547.74,6731.09 ; LCD.14@5526.14,6695.13 ccw(c5516.76,6735.3) 5556.6,6724.62 ; 5379.49,7650.49 ccw(c5329.99,7700) 5400,7700 cw(c5329.99,7700) 5379.49,7650.49 ; 5389.15,7660.15 cw(c5425,7624.3) 5425,7675 ccw(c5425,7624.3) 5389.15,7660.15 ; 5396.56,7667.56 ccw(c5364.13,7700) 5410,7700 cw(c5364.13,7700) 5396.56,7667.56 ; LCD.33@5425,7715 ccw(c5425,7758.46) 5455.73,7727.73 cw(c5425,7758.46) LCD.33@5425,7715 ; LCD.33@5425,7725 ccw(c5425,7792.6) 5472.8,7744.8 cw(c5425,7792.6) LCD.33@5425,7725 ; LCD.33@5440,7700 cw(c5468.97,7700) 5448.49,7720.49 ccw(c5468.97,7700) LCD.33@5440,7700 ; LCD.33@5450,7700 cw(c5503.11,7700) 5465.56,7737.56 ccw(c5503.11,7700) LCD.33@5450,7700 ; LCD.14@5525,6715 ccw(c5525,6746.38) 5547.19,6724.19 cw(c5525,6746.38) LCD.14@5525,6715 ; LCD.14@5525,6725 ccw(c5525,6780.53) 5564.26,6741.26 cw(c5525,6780.53) LCD.14@5525,6725 ; LCD.14@5540,6700 cw(c5581.04,6700) 5552.02,6729.02 ccw(c5581.04,6700) LCD.14@5540,6700 ; LCD.14@5550,6700 cw(c5615.18,6700) 5569.09,6746.09 ccw(c5615.18,6700) LCD.14@5550,6700
  other v1: 3736,7298
PE12: LCD.15 P4.22 U3.65 | length 4274.3
  Top Layer w10: P4.22@3300,8050 3300,8019.91 3349.43,7970.48 ; P4.22@3306.66,8056.87 cw(c3252.87,8001.4) 3330.13,8002.59 ; P4.22@3313.62,8064.05 cw(c3276.64,8025.91) 3329.76,8026.73 ; U3.65@3716,6747.9 3716,7555 3349.43,7921.57 3349.43,7970.48 ; 3349.43,7970.48 cw(c3403.04,8024.09) 3329.51,8042.58 ccw(c3403.04,8024.09) 3349.43,7970.48 ; P4.22@3300.42,8049.89 ccw(c3343.26,8039.12) 3312.02,8007.88 cw(c3343.26,8039.12) P4.22@3300.42,8049.89 ; P4.22@3310.12,8047.46 ccw(c3363.19,8034.11) 3324.49,7995.42 cw(c3363.19,8034.11) P4.22@3310.12,8047.46 ; P4.22@3319.82,8045.02 ccw(c3383.11,8029.1) 3336.96,7982.95 cw(c3383.11,8029.1) P4.22@3319.82,8045.02
  Bottom Layer w10: v1@3715,7044 5181,7044 LCD.15@5425,6800 ; 5393.65,6823.68 ccw(c5431.95,6833.94) LCD.15@5424,6795.1 ; 5401.32,6831.35 cw(c5391.06,6793.05) LCD.15@5429.9,6801 ; 5382.32,6842.68 cw(c5339.64,6800) 5400,6800 ccw(c5339.64,6800) 5382.32,6842.68 ; 5382.32,6842.68 ccw(c5425,6885.36) 5425,6825 cw(c5425,6885.36) 5382.32,6842.68 ; 5399.39,6825.61 cw(c5373.79,6800) 5410,6800 ccw(c5373.79,6800) 5399.39,6825.61 ; 5399.39,6825.61 ccw(c5425,6851.21) 5425,6815 cw(c5425,6851.21) 5399.39,6825.61
  other v1: 3716,7044
PE13: LCD.16 P4.21 U3.66 | length 3765.4
  Top Layer w10: P4.21@3300,7950 3300,7940 3696,7544 U3.66@3696,6746
  Bottom Layer w10: v1@3695,7025 5125,7025 5394,6756 5458.13,6756 5502.13,6800 LCD.16@5525,6800 ; 5480.85,6772.23 ccw(c5475.23,6842.39) LCD.16@5528.81,6796.76 ; 5504.92,6774.16 ccw(c5501.22,6820.25) LCD.16@5536.42,6790.27 ; v1@3697.77,7022.23 cw(c3704.45,7015.55) 3704.45,7025 ccw(c3704.45,7015.55) v1@3697.77,7022.23 ; 5458.13,6756 cw(c5507.78,6706.35) 5520.48,6775.41 ccw(c5507.78,6706.35) 5458.13,6756 ; 5471.6,6769.47 cw(c5511.97,6729.1) 5522.29,6785.25 ccw(c5511.97,6729.1) 5471.6,6769.47 ; 5485.06,6782.93 cw(c5516.15,6751.84) 5524.1,6795.08 ccw(c5516.15,6751.84) 5485.06,6782.93
  other v1: 3696,7024
PE14: LCD.17 P4.20 U3.67 | length 4291.6
  Top Layer w10: P4.20@3200,8050 3200,8019.91 3249.43,7970.48 ; P4.20@3206.66,8056.87 cw(c3152.87,8001.4) 3230.13,8002.59 ; P4.20@3213.62,8064.05 cw(c3176.64,8025.91) 3229.76,8026.73 ; U3.67@3677,6747 3677,7501 3249.43,7928.57 3249.43,7970.48 ; 3249.43,7970.48 cw(c3303.04,8024.09) 3229.51,8042.58 ccw(c3303.04,8024.09) 3249.43,7970.48 ; P4.20@3200.42,8049.89 ccw(c3243.26,8039.12) 3212.02,8007.88 cw(c3243.26,8039.12) P4.20@3200.42,8049.89 ; P4.20@3210.12,8047.46 ccw(c3263.19,8034.11) 3224.49,7995.42 cw(c3263.19,8034.11) P4.20@3210.12,8047.46 ; P4.20@3219.82,8045.02 ccw(c3283.11,8029.1) 3236.96,7982.95 cw(c3283.11,8029.1) P4.20@3219.82,8045.02
  Bottom Layer w10: v1@3676,7090 5227,7090 5419,6898 LCD.17@5425,6898 ; 5394.66,6919.92 ccw(c5427.25,6928.65) LCD.17@5424.61,6895.02 ; 5397.56,6932.35 cw(c5385.56,6887.59) LCD.17@5429.77,6901.5 ; 5368.67,6948.33 ccw(c5425,7004.67) 5425,6925 cw(c5425,7004.67) 5368.67,6948.33 ; 5385.74,6931.26 ccw(c5425,6970.53) 5425,6915 cw(c5425,6970.53) 5385.74,6931.26 ; 5387.98,6929.02 cw(c5358.96,6900) 5400,6900 ccw(c5358.96,6900) 5387.98,6929.02
  other v1: 3677,7090
PE15: LCD.18 P4.19 U3.68 | length 3999
  Top Layer w10: P4.19@3190.46,7949.28 ccw(c3229.53,7952.21) 3219.39,7914.37 ; P4.19@3198.34,7939.7 cw(c3191.86,7899.57) 3231.13,7910.09 ; P4.19@3199.93,7949.57 cw(c3194.56,7916.28) 3227.13,7925.01 ; P4.19@3200,7950 3200,7940 3657,7483 U3.68@3657,6746 ; P4.19@3200,7919.57 cw(c3200,7870.24) 3234.88,7905.12 ccw(c3200,7870.24) P4.19@3200,7919.57 ; P4.19@3210.43,7950 ccw(c3259.76,7950) 3224.88,7915.12 cw(c3259.76,7950) P4.19@3210.43,7950 ; P4.19@3220.43,7950 ccw(c3293.9,7950) 3241.95,7898.05 cw(c3293.9,7950) P4.19@3220.43,7950 ; P4.19@3230.43,7950 ccw(c3328.05,7950) 3259.02,7880.98 cw(c3328.05,7950) P4.19@3230.43,7950
  Bottom Layer w10: v1(3657,7066) 5196.77,7066 5406.77,6856 5443.23,6856 5487.23,6900 ; LCD.18@5525,6900 5487.23,6900 ; 5487.23,6900 cw(c5487.23,6883.96) 5501.99,6890.23 ccw(c5487.23,6883.96) 5487.23,6900 ; 5487.23,6900 ccw(c5487.23,6916.04) 5501.99,6909.77 cw(c5487.23,6916.04) 5487.23,6900
PF0: P3.54 U3.10 | length 2271.6
  Top Layer w10: U3.10@4351.83,6152 4437.22,6152 4573,6016.22 4573,4950.48 4716.48,4807 4789.78,4807 4896.78,4700 P3.54@4900,4700 ; 4859.04,4741.41 cw(c4844.33,4686.49) P3.54@4899.58,4699.9 ; 4875.32,4737.04 cw(c4862.99,4691.02) P3.54@4909.3,4702.26 ; 4842.55,4754.23 ccw(c4900,4811.68) 4900,4730.43 cw(c4900,4811.68) 4842.55,4754.23 ; 4850.33,4746.45 cw(c4803.87,4700) 4869.57,4700 ccw(c4803.87,4700) 4850.33,4746.45 ; 4859.62,4737.16 ccw(c4900,4777.54) 4900,4720.43 cw(c4900,4777.54) 4859.62,4737.16 ; 4867.4,4729.38 cw(c4838.01,4700) 4879.57,4700 ccw(c4838.01,4700) 4867.4,4729.38
PF1: P3.53 U3.11 | length 2561.2
  Top Layer w10: U3.11@4351,6172 4444.09,6172 4592,6024.09 4592,4958.35 4724.35,4826 4843.91,4826 4949.43,4720.48 4949.43,4679.52 ; P3.53@4900,4600 4900,4630.09 4949.43,4679.52 ; P3.53@4903.04,4598.9 ccw(c4863.09,4639.81) 4920.27,4639.14 ; P3.53@4910.03,4591.75 ccw(c4863.9,4638.98) 4929.92,4638.2 ; 4949.43,4679.52 ccw(c5003.13,4625.82) 4929.55,4607.04 cw(c5003.13,4625.82) 4949.43,4679.52 ; P3.53@4900.48,4599.62 cw(c4943.78,4610.67) 4912.18,4642.27 ccw(c4943.78,4610.67) P3.53@4900.48,4599.62 ; P3.53@4910.17,4602.09 cw(c4963.56,4615.72) 4924.6,4654.69 ccw(c4963.56,4615.72) P3.53@4910.17,4602.09 ; P3.53@4919.86,4604.57 cw(c4983.34,4620.77) 4937.01,4667.11 ccw(c4983.34,4620.77) P3.53@4919.86,4604.57
PF2: P3.56 U3.12 | length 2389.6
  Top Layer w10: U3.12@4350,6191 4451.96,6191 4611,6031.96 4611,4966.22 4732.22,4845 4851.78,4845 4996.78,4700 P3.56@5000,4700 ; 4959.04,4741.41 cw(c4944.33,4686.49) P3.56@4999.58,4699.9 ; 4975.32,4737.04 cw(c4962.99,4691.02) P3.56@5009.3,4702.26 ; 4942.55,4754.23 ccw(c5000,4811.68) 5000,4730.43 cw(c5000,4811.68) 4942.55,4754.23 ; 4950.33,4746.45 cw(c4903.87,4700) 4969.57,4700 ccw(c4903.87,4700) 4950.33,4746.45 ; 4959.62,4737.16 ccw(c5000,4777.54) 5000,4720.43 cw(c5000,4777.54) 4959.62,4737.16 ; 4967.4,4729.38 cw(c4938.01,4700) 4979.57,4700 ccw(c4938.01,4700) 4967.4,4729.38
PF3: P3.55 U3.13 | length 2678.4
  Top Layer w10: U3.13@4350,6211 4458.83,6211 4630,6039.83 4630,4974.09 4740.09,4864 4905.91,4864 5049.43,4720.48 5049.43,4679.52 ; P3.55@5000,4600 5000,4630.09 5049.43,4679.52 ; P3.55@5003.04,4598.9 ccw(c4963.09,4639.81) 5020.27,4639.14 ; P3.55@5010.03,4591.75 ccw(c4963.9,4638.98) 5029.92,4638.2 ; 5049.43,4679.52 ccw(c5103.13,4625.82) 5029.55,4607.04 cw(c5103.13,4625.82) 5049.43,4679.52 ; P3.55@5000.48,4599.62 cw(c5043.78,4610.67) 5012.18,4642.27 ccw(c5043.78,4610.67) P3.55@5000.48,4599.62 ; P3.55@5010.17,4602.09 cw(c5063.56,4615.72) 5024.6,4654.69 ccw(c5063.56,4615.72) P3.55@5010.17,4602.09 ; P3.55@5019.86,4604.57 cw(c5083.34,4620.77) 5037.01,4667.11 ccw(c5083.34,4620.77) P3.55@5019.86,4604.57
PF4: P3.58 U3.14 | length 2506.2
  Top Layer w10: U3.14@4350,6231 4465.7,6231 4649,6047.7 4649,4981.96 4747.96,4883 4913.78,4883 5096.78,4700 P3.58@5100,4700 ; 5059.04,4741.41 cw(c5044.33,4686.49) P3.58@5099.58,4699.9 ; 5075.32,4737.04 cw(c5062.99,4691.02) P3.58@5109.3,4702.26 ; 5042.55,4754.23 ccw(c5100,4811.68) 5100,4730.43 cw(c5100,4811.68) 5042.55,4754.23 ; 5050.33,4746.45 cw(c5003.87,4700) 5069.57,4700 ccw(c5003.87,4700) 5050.33,4746.45 ; 5059.62,4737.16 ccw(c5100,4777.54) 5100,4720.43 cw(c5100,4777.54) 5059.62,4737.16 ; 5067.4,4729.38 cw(c5038.01,4700) 5079.57,4700 ccw(c5038.01,4700) 5067.4,4729.38